# Allegro board ebf_xc7a35t b1 board.brd
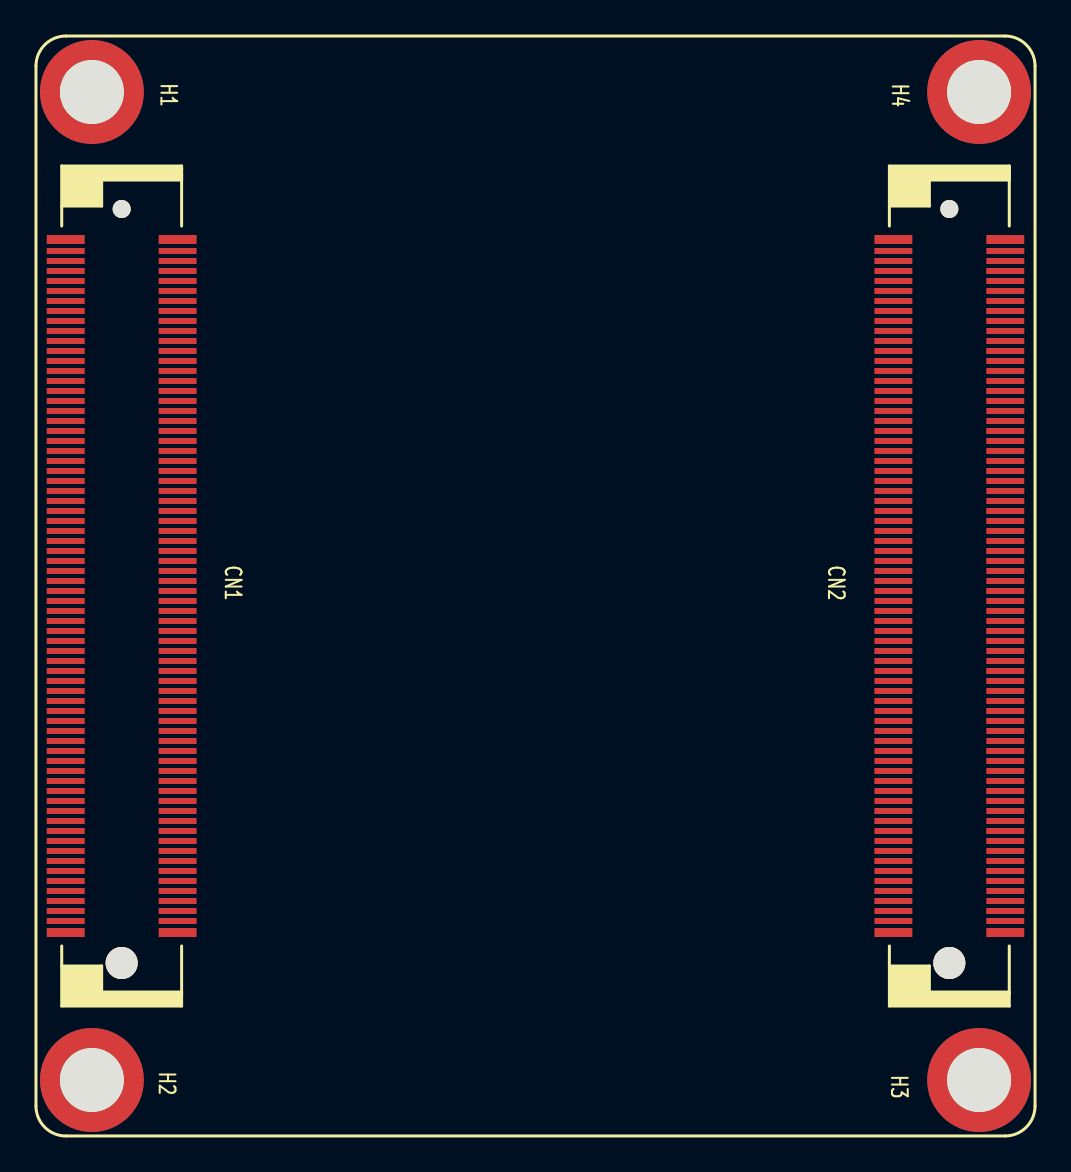
[diagram p0: board, top side]
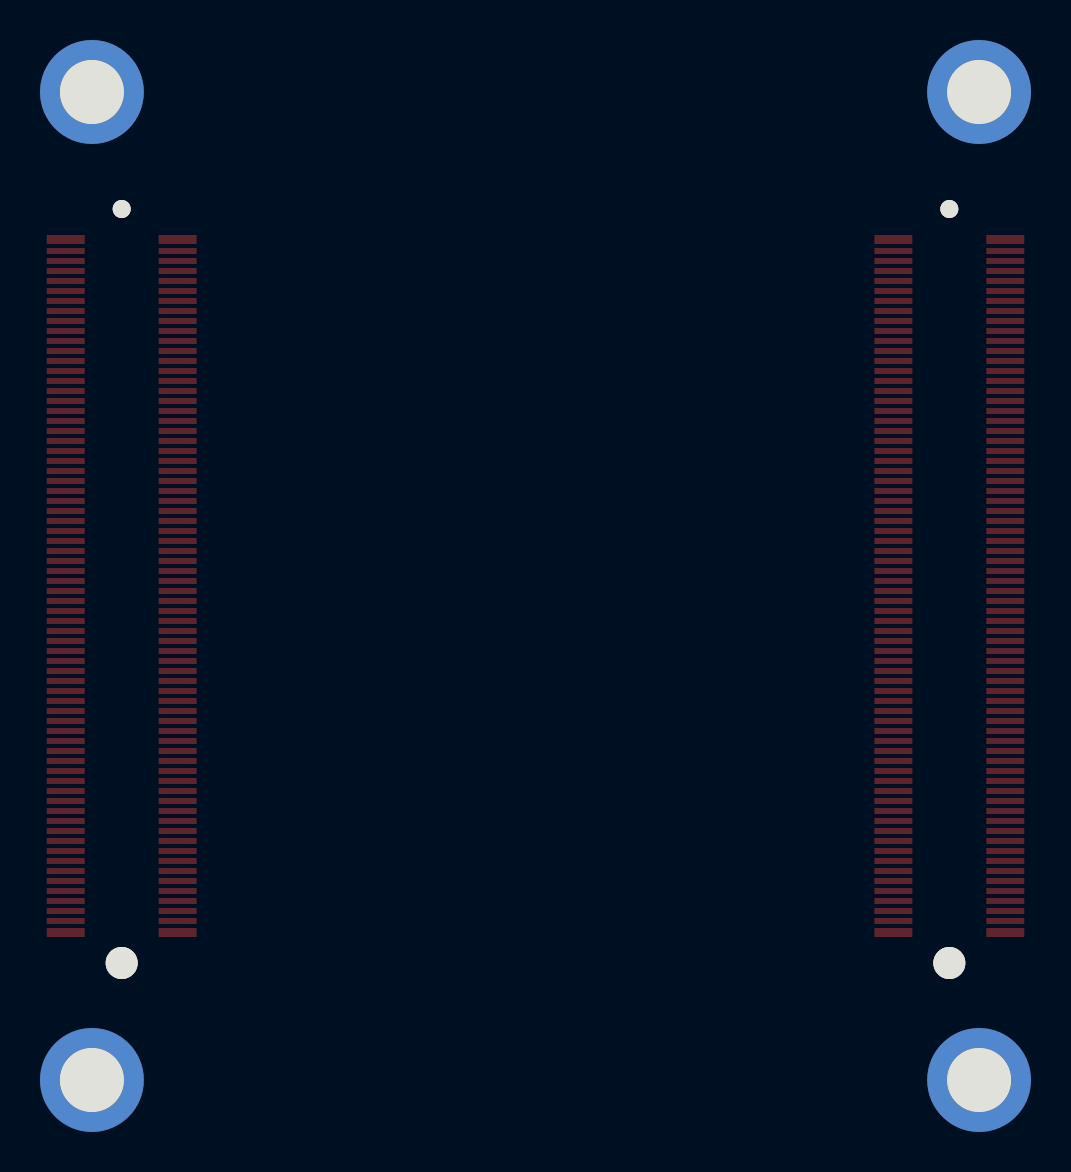
[diagram p1: board, bottom side, seen from below]

No outline. copper layers: TOP, GND02, PWR03, BOTTOM. Coordinates in mm from the lowest, leftmost part position.

## Design rules (mm)
net group HDMI1_TX0_: nets HDMI1_TX0_N HDMI1_TX0_P
net group HDMI1_TX1_: nets HDMI1_TX1_N HDMI1_TX1_P
net group HDMI1_TX2_: nets HDMI1_TX2_N HDMI1_TX2_P
net group HDMI1_TXC_: nets HDMI1_TXC_N HDMI1_TXC_P
net group HDMI2_TX0_: nets HDMI2_TX0_N HDMI2_TX0_P
net group HDMI2_TX1_: nets HDMI2_TX1_N HDMI2_TX1_P
net group HDMI2_TX2_: nets HDMI2_TX2_N HDMI2_TX2_P
net group HDMI2_TXC_: nets HDMI2_TXC_N HDMI2_TXC_P
net group PWR: nets 12V GND
net group XADC_V: nets XADC_VN XADC_VP

## Placement (name value [footprint] x y rotation side)
CN1  b2bm-2x70-0p5  [B2BM-2X70-0P5_BZOOC]  1.49 24.7 270 top
CN2  b2bm-2x70-0p5  [B2BM-2X70-0P5_BZOOC]  42.91 24.7 270 top
H1  2.0mm  [T3R2-5R2_TOPSMT]  0 49.4 270 top
H2  2.0mm  [T3R2-5R2_TOPSMT]  0 0 270 top
H3  2.0mm  [T3R2-5R2_TOPSMT]  44.4 0 270 top
H4  2.0mm  [T3R2-5R2_TOPSMT]  44.4 49.4 270 top

## Library data of the parts
CN1 CN2 = BTB_CONNECT_5
H1-H4 = SPACER_0

## Footprints (pads in the part's own frame, mm; a bottom-side part is the same pattern mirrored in y, then rotated)
B2BM-2X70-0P5_BZOOC
  round 0.9 hole 0.9 unplated: (-18.85,0)
  round 1.6 hole 1.6 unplated: (18.85,0)
  rect 0.45x1.9 smd: 1(-17.325,2.8) 2(-17.325,-2.8) 139(17.325,2.8) 140(17.325,-2.8)
  rect 0.3x1.9 smd: 3(-16.75,2.8) 4(-16.75,-2.8) 5(-16.25,2.8) 6(-16.25,-2.8) 7(-15.75,2.8) 8(-15.75,-2.8) 9(-15.25,2.8) 10(-15.25,-2.8) 11(-14.75,2.8) 12(-14.75,-2.8) 13(-14.25,2.8) 14(-14.25,-2.8) 15(-13.75,2.8) 16(-13.75,-2.8) 17(-13.25,2.8) 18(-13.25,-2.8) 19(-12.75,2.8) 20(-12.75,-2.8) 21(-12.25,2.8) 22(-12.25,-2.8) 23(-11.75,2.8) 24(-11.75,-2.8) 25(-11.25,2.8) 26(-11.25,-2.8) 27(-10.75,2.8) 28(-10.75,-2.8) 29(-10.25,2.8) 30(-10.25,-2.8) 31(-9.75,2.8) 32(-9.75,-2.8) 33(-9.25,2.8) 34(-9.25,-2.8) 35(-8.75,2.8) 36(-8.75,-2.8) 37(-8.25,2.8) 38(-8.25,-2.8) 39(-7.75,2.8) 40(-7.75,-2.8) 41(-7.25,2.8) 42(-7.25,-2.8) 43(-6.75,2.8) 44(-6.75,-2.8) 45(-6.25,2.8) 46(-6.25,-2.8) 47(-5.75,2.8) 48(-5.75,-2.8) 49(-5.25,2.8) 50(-5.25,-2.8) 51(-4.75,2.8) 52(-4.75,-2.8) 53(-4.25,2.8) 54(-4.25,-2.8) 55(-3.75,2.8) 56(-3.75,-2.8) 57(-3.25,2.8) 58(-3.25,-2.8) 59(-2.75,2.8) 60(-2.75,-2.8) 61(-2.25,2.8) 62(-2.25,-2.8) 63(-1.75,2.8) 64(-1.75,-2.8) 65(-1.25,2.8) 66(-1.25,-2.8) 67(-0.75,2.8) 68(-0.75,-2.8) 69(-0.25,2.8) 70(-0.25,-2.8) 71(0.25,2.8) 72(0.25,-2.8) 73(0.75,2.8) 74(0.75,-2.8) 75(1.25,2.8) 76(1.25,-2.8) 77(1.75,2.8) 78(1.75,-2.8) 79(2.25,2.8) 80(2.25,-2.8) 81(2.75,2.8) 82(2.75,-2.8) 83(3.25,2.8) 84(3.25,-2.8) 85(3.75,2.8) 86(3.75,-2.8) 87(4.25,2.8) 88(4.25,-2.8) 89(4.75,2.8) 90(4.75,-2.8) 91(5.25,2.8) 92(5.25,-2.8) 93(5.75,2.8) 94(5.75,-2.8) 95(6.25,2.8) 96(6.25,-2.8) 97(6.75,2.8) 98(6.75,-2.8) 99(7.25,2.8) 100(7.25,-2.8) 101(7.75,2.8) 102(7.75,-2.8) 103(8.25,2.8) 104(8.25,-2.8) 105(8.75,2.8) 106(8.75,-2.8) 107(9.25,2.8) 108(9.25,-2.8) 109(9.75,2.8) 110(9.75,-2.8) 111(10.25,2.8) 112(10.25,-2.8) 113(10.75,2.8) 114(10.75,-2.8) 115(11.25,2.8) 116(11.25,-2.8) 117(11.75,2.8) 118(11.75,-2.8) 119(12.25,2.8) 120(12.25,-2.8) 121(12.75,2.8) 122(12.75,-2.8) 123(13.25,2.8) 124(13.25,-2.8) 125(13.75,2.8) 126(13.75,-2.8) 127(14.25,2.8) 128(14.25,-2.8) 129(14.75,2.8) 130(14.75,-2.8) 131(15.25,2.8) 132(15.25,-2.8) 133(15.75,2.8) 134(15.75,-2.8) 135(16.25,2.8) 136(16.25,-2.8) 137(16.75,2.8) 138(16.75,-2.8)
T3R2-5R2_TOPSMT
  round 5.2 hole 3.2: 1(0,0)

## Nets
12V: CN1.1 CN1.2 CN1.3 CN1.4 CN1.5 CN1.6 CN1.7 CN1.8
GND: CN1.11 CN1.12 CN1.21 CN1.22 CN1.31 CN1.32 CN1.41 CN1.42 CN1.51 CN1.52 CN1.57 CN1.59 CN1.61 CN1.62 CN1.69 CN1.70 CN1.79 CN1.80 CN1.89 CN1.90 CN1.99 CN1.100 CN1.109 CN1.110 CN1.119 CN1.120 CN1.129 CN1.130 CN1.135 CN1.137 CN1.139 CN2.1 CN2.2 CN2.3 CN2.4 CN2.9 CN2.10 CN2.15 CN2.16 CN2.21 CN2.22 CN2.27 CN2.28 CN2.30 CN2.32 CN2.33 CN2.34 CN2.45 CN2.46 CN2.55 CN2.56 CN2.65 CN2.66 CN2.75 CN2.76 CN2.85 CN2.86 CN2.95 CN2.96 CN2.105 CN2.106 CN2.115 CN2.116 CN2.125 CN2.127 CN2.130 CN2.133 CN2.134 CN2.139 CN2.140 H1.1(NC_1) H2.1(NC_1) H3.1(NC_1) H4.1(NC_1)
B14_IO25: CN1.68
B14_L4_N: CN1.98
B14_L4_P: CN1.96
B14_L8_N: CN1.74
B14_L8_P: CN1.72
B14_L9_N: CN1.88
B14_L9_P: CN1.86
B14_L10_N: CN1.84
B14_L10_P: CN1.82
B14_L11_N: CN1.78
B14_L11_P: CN1.76
B14_L17_N: CN1.60
B14_L19_N: CN1.104
B14_L19_P: CN1.102
B14_L20_N: CN1.94
B14_L20_P: CN1.92
B14_L21_N: CN1.66
B14_L21_P: CN1.64
B14_L24_N: CN1.108
B14_L24_P: CN1.106
B15_L9_N: CN1.133
B15_L9_P: CN1.131
B15_L10_N: CN1.134
B15_L10_P: CN1.132
B15_L14_N: CN1.128
B15_L14_P: CN1.126
B15_L16_N: CN1.124
B15_L16_P: CN1.122
B15_L17_N: CN1.118
B15_L17_P: CN1.116
B15_L22_N: CN1.114
B15_L22_P: CN1.112
BEEP: CN1.58
CTP_INT: CN1.77
CTP_RST: CN1.75
DIG1: CN2.122
DIG2: CN2.120
DIG3: CN2.118
DIG4: CN2.114
DIG5: CN2.112
DIG6: CN2.110
ETH_INTB: CN2.68
ETH_MDC: CN2.102
ETH_MDIO: CN2.100
ETH_NRST: CN2.104
ETH_RX_CLK: CN2.72
ETH_RX_CTL: CN2.78
ETH_RXD0: CN2.80
ETH_RXD1: CN2.82
ETH_RXD2: CN2.84
ETH_RXD3: CN2.88
ETH_TX_CLK: CN2.74
ETH_TX_CTL: CN2.70
ETH_TXD0: CN2.90
ETH_TXD1: CN2.92
ETH_TXD2: CN2.94
ETH_TXD3: CN2.98
FAN_PWM: CN1.136
HDMI1_CEC: CN2.44
HDMI1_HPD: CN2.42
HDMI1_OUT_EN: CN2.36
HDMI1_SCL: CN2.40
HDMI1_SDA: CN2.38
HDMI1_TX0_N: CN2.54
HDMI1_TX0_P: CN2.52
HDMI1_TX1_N: CN2.60
HDMI1_TX1_P: CN2.58
HDMI1_TX2_N: CN2.64
HDMI1_TX2_P: CN2.62
HDMI1_TXC_N: CN2.50
HDMI1_TXC_P: CN2.48
HDMI2_CEC: CN2.43
HDMI2_HPD: CN2.37
HDMI2_OUT_EN: CN2.35
HDMI2_SCL: CN2.41
HDMI2_SDA: CN2.39
HDMI2_TX0_N: CN2.53
HDMI2_TX0_P: CN2.51
HDMI2_TX1_N: CN2.59
HDMI2_TX1_P: CN2.57
HDMI2_TX2_N: CN2.63
HDMI2_TX2_P: CN2.61
HDMI2_TXC_N: CN2.49
HDMI2_TXC_P: CN2.47
I2C_SCL: CN2.124
I2C_SDA: CN2.126
JTAG_TCK: CN2.136
JTAG_TDI: CN2.137
JTAG_TDO: CN2.135
JTAG_TMS: CN2.138
KEY1: CN1.65
KEY2: CN1.63
KEY3: CN1.67
KEY4: CN1.71
LCD_B0: CN2.93
LCD_B1: CN2.91
LCD_B2: CN2.89
LCD_B3: CN2.87
LCD_B4: CN2.83
LCD_B5: CN2.81
LCD_B6: CN2.79
LCD_B7: CN2.77
LCD_BL: CN1.81
LCD_CLK: CN2.73
LCD_DE: CN2.67
LCD_G0: CN2.113
LCD_G1: CN2.111
LCD_G2: CN2.109
LCD_G3: CN2.107
LCD_G4: CN2.103
LCD_G5: CN2.101
LCD_G6: CN2.99
LCD_G7: CN2.97
LCD_HS: CN2.71
LCD_R0: CN2.132
LCD_R1: CN2.128
LCD_R2: CN2.131
LCD_R3: CN2.129
LCD_R4: CN2.123
LCD_R5: CN2.121
LCD_R6: CN2.119
LCD_R7: CN2.117
LCD_VS: CN2.69
LED1: CN1.121
LED2: CN1.123
LED3: CN1.125
LED4: CN1.127
LEDSD_A: CN1.95
LEDSD_B: CN1.101
LEDSD_C: CN1.85
LEDSD_D: CN1.97
LEDSD_DP: CN1.93
LEDSD_E: CN1.83
LEDSD_F: CN1.87
LEDSD_G: CN1.91
PROGRAM: CN1.9
RESET: CN1.73
SD_CD: CN1.117
SD_CLK: CN1.111
SD_CMD: CN1.107
SD_D0: CN1.113
SD_D1: CN1.115
SD_D2: CN1.103
SD_D3: CN1.105
UART1_RX: CN1.56
UART1_TX: CN1.54
XADC_VN: CN1.140
XADC_VP: CN1.138

Pads without a net: CN1 10 13 14 15 16 17 18 19 20 23 24 25 26 27 28 29 30 33 34 35 36 37 38 39 40 43 44 45 46 47 48 49 50 53 55; CN2 5 6 7 8 11 12 13 14 17 18 19 20 23 24 25 26 29 31 108
